# EAGLE board board (EAGLE 6.5.0)
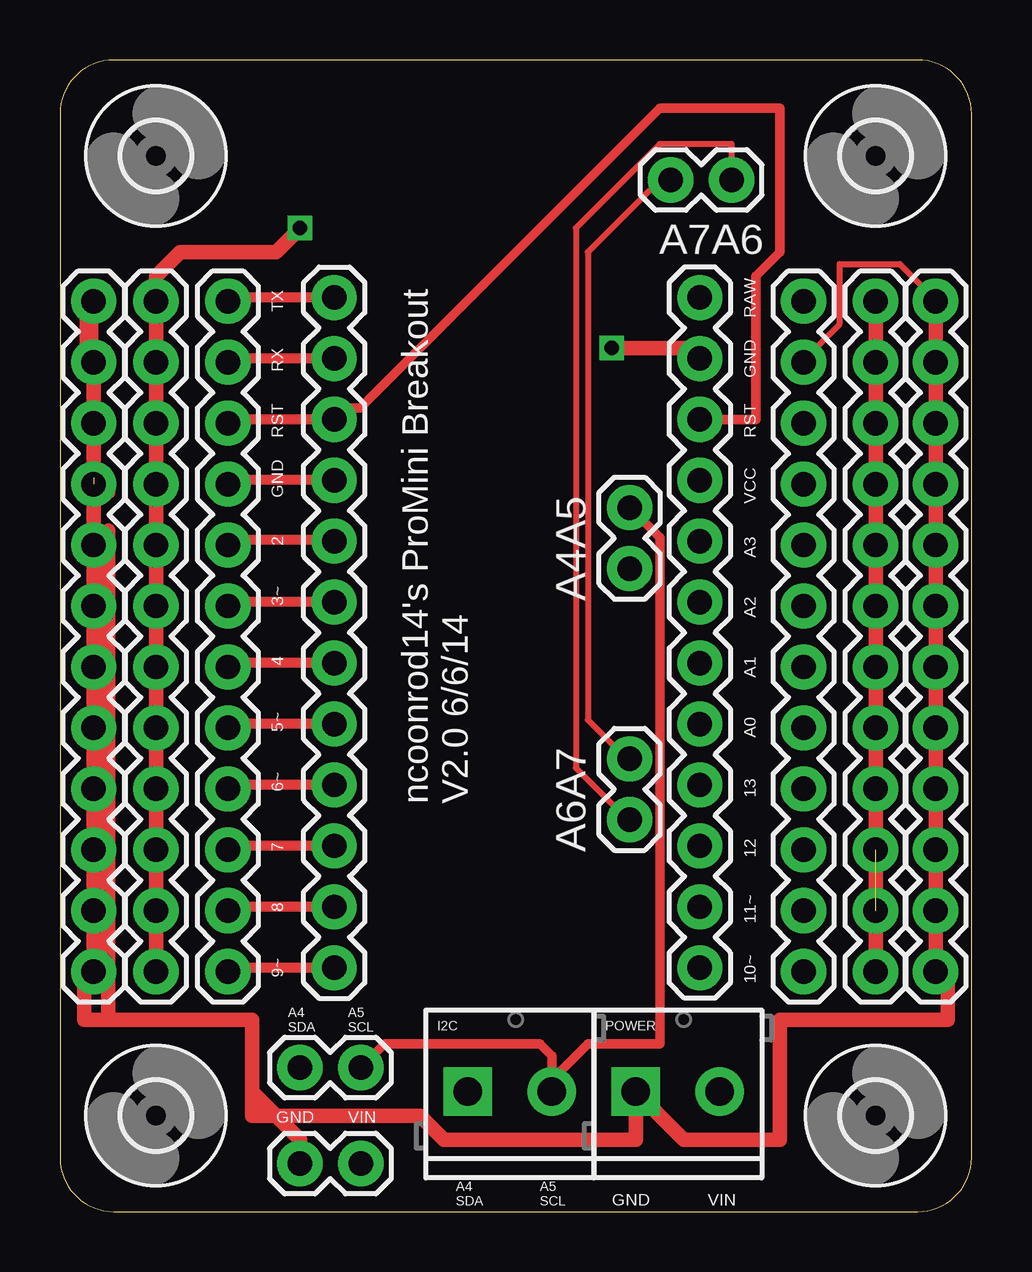
[diagram p0: board, top side]
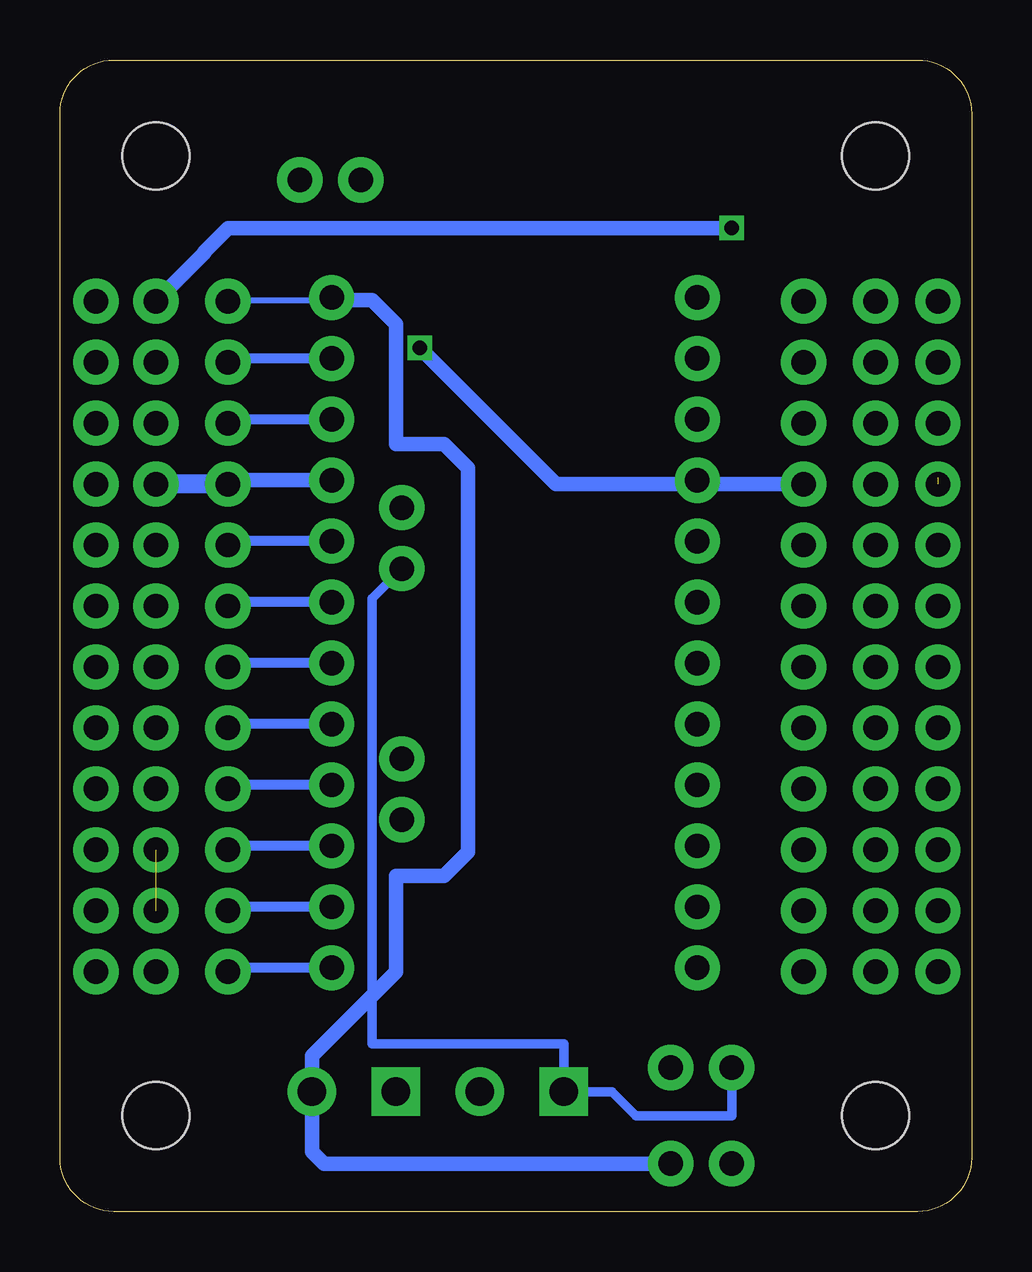
[diagram p1: board, bottom side, seen from below]

Size 38 x 48 mm. Coordinates in mm from the lower left corner, seen from the top.
Outline: 0,45.76 0,2.24 arc90 2.24,0 35.76,0 arc90 38,2.24 38,45.76 arc90 35.76,48 2.24,48 arc90 0,45.76
Copper layers (1*16): Top 0.035mm / dielectric 1.5mm / Bottom 0.035mm
Design rules "default": minimum track width 10mil, minimum drill 24mil, track to track 8mil, track to pad 8mil, pad to pad 8mil, via to via 8mil, smd to smd 8mil, copper to edge 40mil, drill to drill 8mil, minimum pad ring 10mil, minimum via ring 8mil, stop-mask expansion 4mil, vias tented up to drill 0mil, thermal gap 10mil

## Footprints (pad centres in the part's own frame; a part is rotated, then mirrored left to right if it is on the bottom)
1X02 = drill 1.016 pad 1.88: 1 0,0; 2 2.54,0
2,8 = hole 2.8: 0,0
SCREWTERMINAL-3.5MM-2 = drill 1.2 pad 2.032 square: 1 0,0 | drill 1.2 pad 2.032: 2 3.5,0
1X12 = drill 1.016 pad 1.88: 1 0,0; 2 2.54,0; 3 5.08,0; 4 7.62,0; 5 10.16,0; 6 12.7,0; 7 15.24,0; 8 17.78,0; 9 20.32,0; 10 22.86,0; 11 25.4,0; 12 27.94,0

## Placement (x,y rotation side)
A4A5  M02PTH  [1X02]  23.75,26.8 90 top
A6A7  M02PTH  [1X02]  23.75,16.33 90 top
A7A6  M02PTH  [1X02]  28,43 180 top
H1  MOUNT-HOLE2.8  [2,8]  4,4 0 top
H2  MOUNT-HOLE2.8  [2,8]  34,4 0 top
H3  MOUNT-HOLE2.8  [2,8]  4,44 0 top
H4  MOUNT-HOLE2.8  [2,8]  34,44 0 top
I2C  M023.5MM  [SCREWTERMINAL-3.5MM-2]  17,5 0 top
I2C.  M02PTH  [1X02]  10,6 0 top
LEFTGND  M12PTH  [1X12]  1.4,10 90 top
LEFTIN  M12PTH  [1X12]  11.43,10.16 90 top
LEFTOUT  M12PTH  [1X12]  7,10 90 top
LEFTVCC  M12PTH  [1X12]  4,10 90 top
POWER  M023.5MM  [SCREWTERMINAL-3.5MM-2]  24,5 0 top
POWER.  M02PTH  [1X02]  10,2 0 top
RIGHTGND  M12PTH  [1X12]  36.5,10 90 top
RIGHTIN  M12PTH  [1X12]  26.67,38.1 270 top
RIGHTOUT  M12PTH  [1X12]  31,10 90 top
RIGHTVCC  M12PTH  [1X12]  34,10 90 top

## Library data of the parts
A4A5 A6A7 A7A6 I2C I2C. LEFTGND LEFTIN LEFTOUT LEFTVCC POWER POWER. RIGHTGND RIGHTIN RIGHTOUT RIGHTVCC = SparkFun-Connectors
H1-H4 = holes

## Nets
2: LEFTIN.8 LEFTOUT.8
3: LEFTIN.7 LEFTOUT.7
4: LEFTIN.6 LEFTOUT.6
5: LEFTIN.5 LEFTOUT.5
6: LEFTIN.4 LEFTOUT.4
7: LEFTIN.3 LEFTOUT.3
8: LEFTIN.2 LEFTOUT.2
9: LEFTIN.1 LEFTOUT.1
10: RIGHTIN.12 RIGHTOUT.1
11: RIGHTIN.11 RIGHTOUT.2
12: RIGHTIN.10 RIGHTOUT.3
13: RIGHTIN.9 RIGHTOUT.4
A0: RIGHTIN.8 RIGHTOUT.5
A1: RIGHTIN.7 RIGHTOUT.6
A2: RIGHTIN.6 RIGHTOUT.7
A3: RIGHTIN.5 RIGHTOUT.8
A4SDA: A4A5.1 I2C.1 I2C..1
A5SCL: A4A5.2 I2C.2 I2C..2
A6: A6A7.1 A7A6.1
A7: A6A7.2 A7A6.2
GND: LEFTGND.1 LEFTGND.2 LEFTGND.3 LEFTGND.4 LEFTGND.5 LEFTGND.6 LEFTGND.7 LEFTGND.8 LEFTGND.9 LEFTGND.10 LEFTGND.11 LEFTGND.12 LEFTIN.9 LEFTOUT.9 POWER.1 POWER..1 RIGHTGND.1 RIGHTGND.2 RIGHTGND.3 RIGHTGND.4 RIGHTGND.5 RIGHTGND.6 RIGHTGND.7 RIGHTGND.8 RIGHTGND.9 RIGHTGND.10 RIGHTGND.11 RIGHTGND.12 RIGHTIN.2 RIGHTOUT.11
RAW: RIGHTOUT.12
RST: LEFTIN.10 LEFTOUT.10 RIGHTIN.3 RIGHTOUT.10
RX: LEFTIN.11 LEFTOUT.11
TX: LEFTIN.12 LEFTOUT.12
VCC: LEFTVCC.1 LEFTVCC.2 LEFTVCC.3 LEFTVCC.4 LEFTVCC.5 LEFTVCC.6 LEFTVCC.7 LEFTVCC.8 LEFTVCC.9 LEFTVCC.10 LEFTVCC.11 LEFTVCC.12 RIGHTIN.4 RIGHTOUT.9 RIGHTVCC.1 RIGHTVCC.2 RIGHTVCC.3 RIGHTVCC.4 RIGHTVCC.5 RIGHTVCC.6 RIGHTVCC.7 RIGHTVCC.8 RIGHTVCC.9 RIGHTVCC.10 RIGHTVCC.11 RIGHTVCC.12
VIN: POWER.2 POWER..2 RIGHTIN.1

## Tracks (layer width: path | path; a pad name or v marks a point on that pad's centre or on a via)
2
  Top 0.406: LEFTIN.8 11.94,27.94 12,28 7.22,28 LEFTOUT.8
3
  Top 0.406: LEFTIN.7 7.16,25.4 LEFTOUT.7
4
  Top 0.406: LEFTIN.6 7.16,22.86 LEFTOUT.6
5
  Top 0.406: LEFTIN.5 7.16,20.32 LEFTOUT.5
6
  Top 0.406: LEFTIN.4 7.16,17.78 LEFTOUT.4
7
  Top 0.406: LEFTIN.3 7.16,15.24 LEFTOUT.3
8
  Top 0.406: LEFTIN.2 7.16,12.7 LEFTOUT.2
9
  Top 0.406: LEFTIN.1 7.16,10.16 LEFTOUT.1
10
  Bottom 0.406: RIGHTIN.12 30.84,10.16 RIGHTOUT.1
11
  Bottom 0.406: RIGHTIN.11 30.84,12.7 RIGHTOUT.2
12
  Bottom 0.406: RIGHTIN.10 30.84,15.24 RIGHTOUT.3
13
  Bottom 0.406: RIGHTIN.9 30.84,17.78 RIGHTOUT.4
A0
  Bottom 0.406: RIGHTIN.8 30.84,20.32 RIGHTOUT.5
A1
  Bottom 0.406: RIGHTIN.7 30.84,22.86 RIGHTOUT.6
A2
  Bottom 0.406: RIGHTIN.6 30.84,25.4 RIGHTOUT.7
A3
  Bottom 0.406: RIGHTIN.5 30.84,27.94 RIGHTOUT.8
A4SDA
  Bottom 0.4: I2C..1 10,4 14,4 15,5 I2C.1 17,7 25,7 25,25.55 A4A5.1
A5SCL
  Top 0.4: I2C..2 13.54,7 20,7 20.5,6.5 I2C.2 20.5,5.5 22,7 25,7 25,28.09 A4A5.2
A6
  Top 0.254: A7A6.1 28,44.5 25,44.5 21.5,41 21.5,18.5 23.5,16.5 A6A7.1
A7
  Top 0.254: A6A7.2 23.5,19 22,20.5 22,40 25,43 A7A6.2
GND  (via drill 0.6)  (1 unrouted)
  Top 0.254: LEFTGND.10 1.5,33 1.4,33 | RIGHTGND.12 36.5,38 35,39.5 32.5,39.5 32.5,37 31,35.5 RIGHTOUT.11
  Top 0.406: LEFTIN.9 7.16,30.48 LEFTOUT.9 | LEFTGND.10 1.4,33 | LEFTGND.9 1.32,30.32 1,30 | 1,28.18 LEFTGND.8 | LEFTGND.11 LEFTGND.12 1.06,37.94 1,38 1,35.8 LEFTGND.11
  Top 0.61: LEFTGND.8 LEFTGND.7 LEFTGND.6 LEFTGND.5 LEFTGND.4 LEFTGND.3 LEFTGND.2 LEFTGND.1 1,9.6 1,8 2,8 | LEFTGND.11 LEFTGND.10 1.4,30.6 | 1.4,30.6 2,30 | LEFTGND.8 2,28.38 2,8 | v23,36 26.23,36 RIGHTIN.2 | RIGHTGND.12 RIGHTGND.11 RIGHTGND.10 RIGHTGND.9 RIGHTGND.8 RIGHTGND.7 RIGHTGND.6 RIGHTGND.5 RIGHTGND.4 RIGHTGND.3 RIGHTGND.2 RIGHTGND.1 37,9.5 37,8 30,8 30,3 26,3 POWER.1 24,3 16,3 15,4 8,4 8,5 | POWER..1 10,3 8,5 | 8,5 8,8 2,8 | 1.4,30.6 LEFTGND.8
  Bottom 0.406: RIGHTIN.2 30.84,35.56 RIGHTOUT.11
  Bottom 0.61: LEFTOUT.9 17.32,30.32 v23,36
RAW
  Top 0.8: 30.94,38 RIGHTOUT.12
  Bottom 0.254: 27,38 31,38 RIGHTOUT.12
RST
  Top 0.254: 11.5,33.5 LEFTIN.10
  Top 0.4: 11.5,33.5 12.5,33.5 25,46 30,46 30,40 29,39 29,33.02 27.02,33.02 27,33 26.69,33 RIGHTIN.3
  Top 0.406: LEFTIN.10 7.16,33.02 LEFTOUT.10
  Bottom 0.406: RIGHTIN.3 30.84,33.02 RIGHTOUT.10
RX
  Top 0.406: LEFTIN.11 7.16,35.56 LEFTOUT.11
TX
  Top 0.406: LEFTIN.12 7.16,38.1 LEFTOUT.12
VCC  (via drill 0.6)  (1 unrouted)
  Top 0.61: LEFTVCC.1 LEFTVCC.2 LEFTVCC.3 LEFTVCC.4 LEFTVCC.5 LEFTVCC.6 LEFTVCC.7 LEFTVCC.8 LEFTVCC.9 | LEFTVCC.9 LEFTVCC.10 LEFTVCC.11 LEFTVCC.12 | LEFTVCC.9 4,39 5,40 9,40 v10,41 | RIGHTVCC.12 RIGHTVCC.11 RIGHTVCC.10 RIGHTVCC.9 RIGHTVCC.8 RIGHTVCC.7 RIGHTVCC.6 RIGHTVCC.5 RIGHTVCC.4 RIGHTVCC.2 RIGHTVCC.1
  Bottom 0.406: 30.84,30.48 RIGHTOUT.9
  Bottom 0.61: v10,41 31,41 32,40 32,39.94 RIGHTVCC.12 | 30.84,30.48 RIGHTIN.4
  Bottom 0.8: RIGHTOUT.9 RIGHTVCC.9
VIN
  Top 0.254: 27,38 RIGHTIN.1
  Bottom 0.61: POWER..2 27,2 27.5,2.5 POWER.2 27.5,6.5 24,10 24,14 22,14 21,15 21,31 22,32 24,32 24,37 25,38 26.57,38 RIGHTIN.1

## Text on the board
_tsilk: TX | RAW | RX | GND | RST | RST | GND | VCC | 2 | A3 | 3~ | A2 | 4 | A1 | 5~ | A0 | 6~ | ncoonrod14's ProMini Breakout / V2.0 6/6/14 | 13 | 7 | 12 | 8 | 11~ | 9~ | 10~ | A4 / SDA | A5 / SCL | GND | VIN | A4 / SDA | A5 / SCL | GND | VIN